# Altium PCB РАЗВОДКА.PcbDoc
Units mm, origin at the board's own origin, x right, y up, seen from the top; angles counter-clockwise.
Board outline 102.8 x 50.03 mm, 2 copper layers (Top Layer, Bottom Layer); 82 components, 57 nets, 350 pads, 71 vias.
Unrouted connection lines stored in the file: 1.
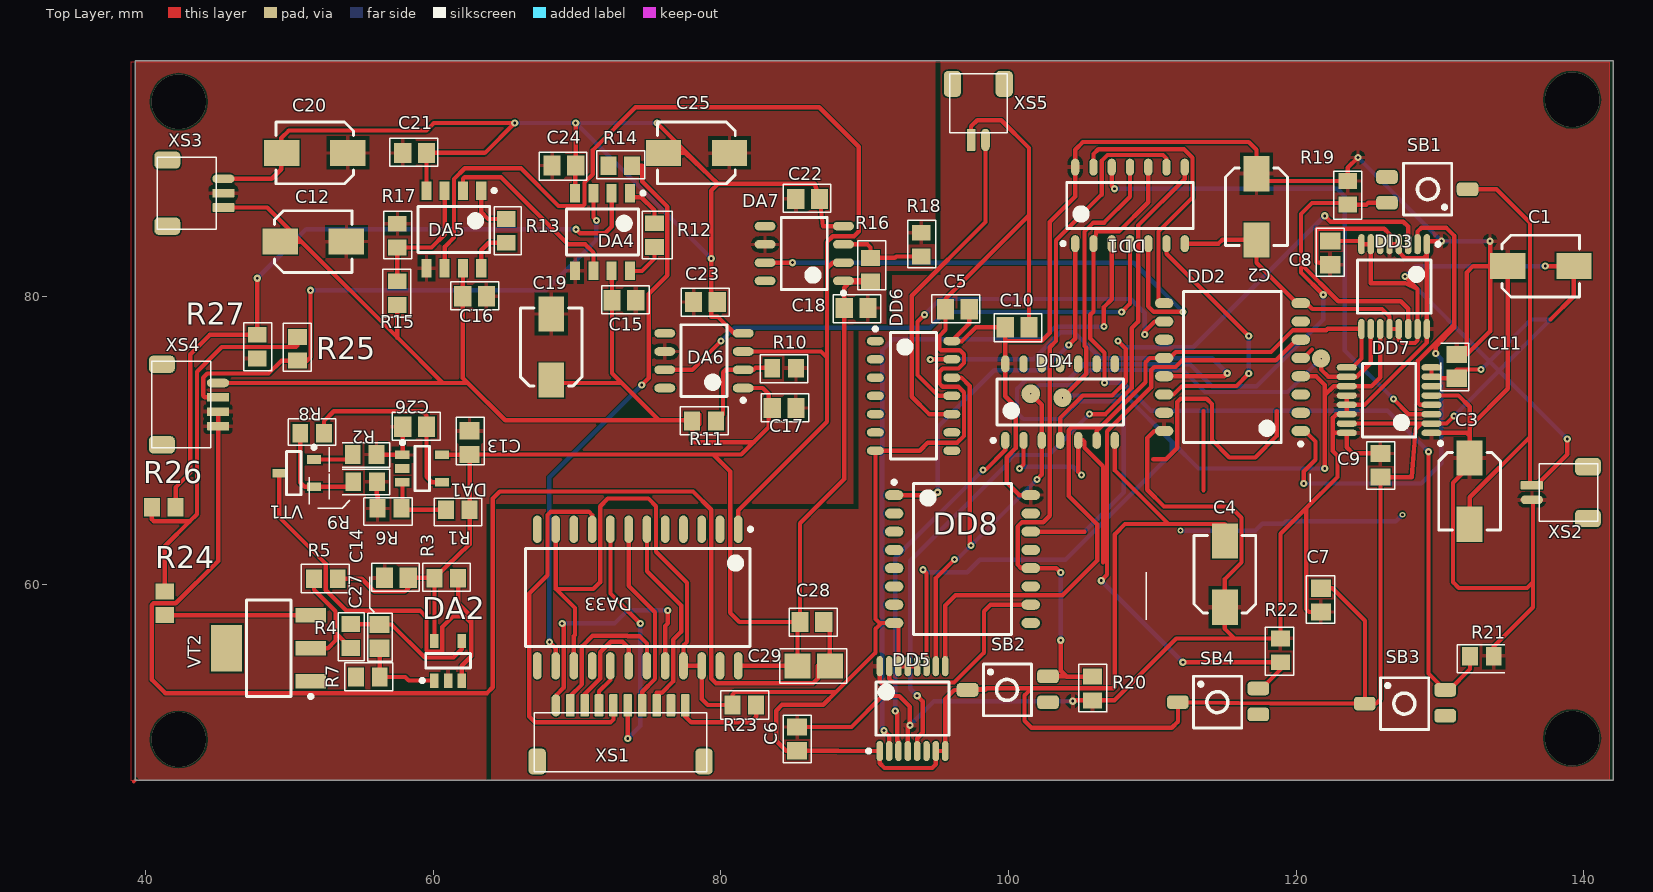
[diagram p0: Top Layer view]
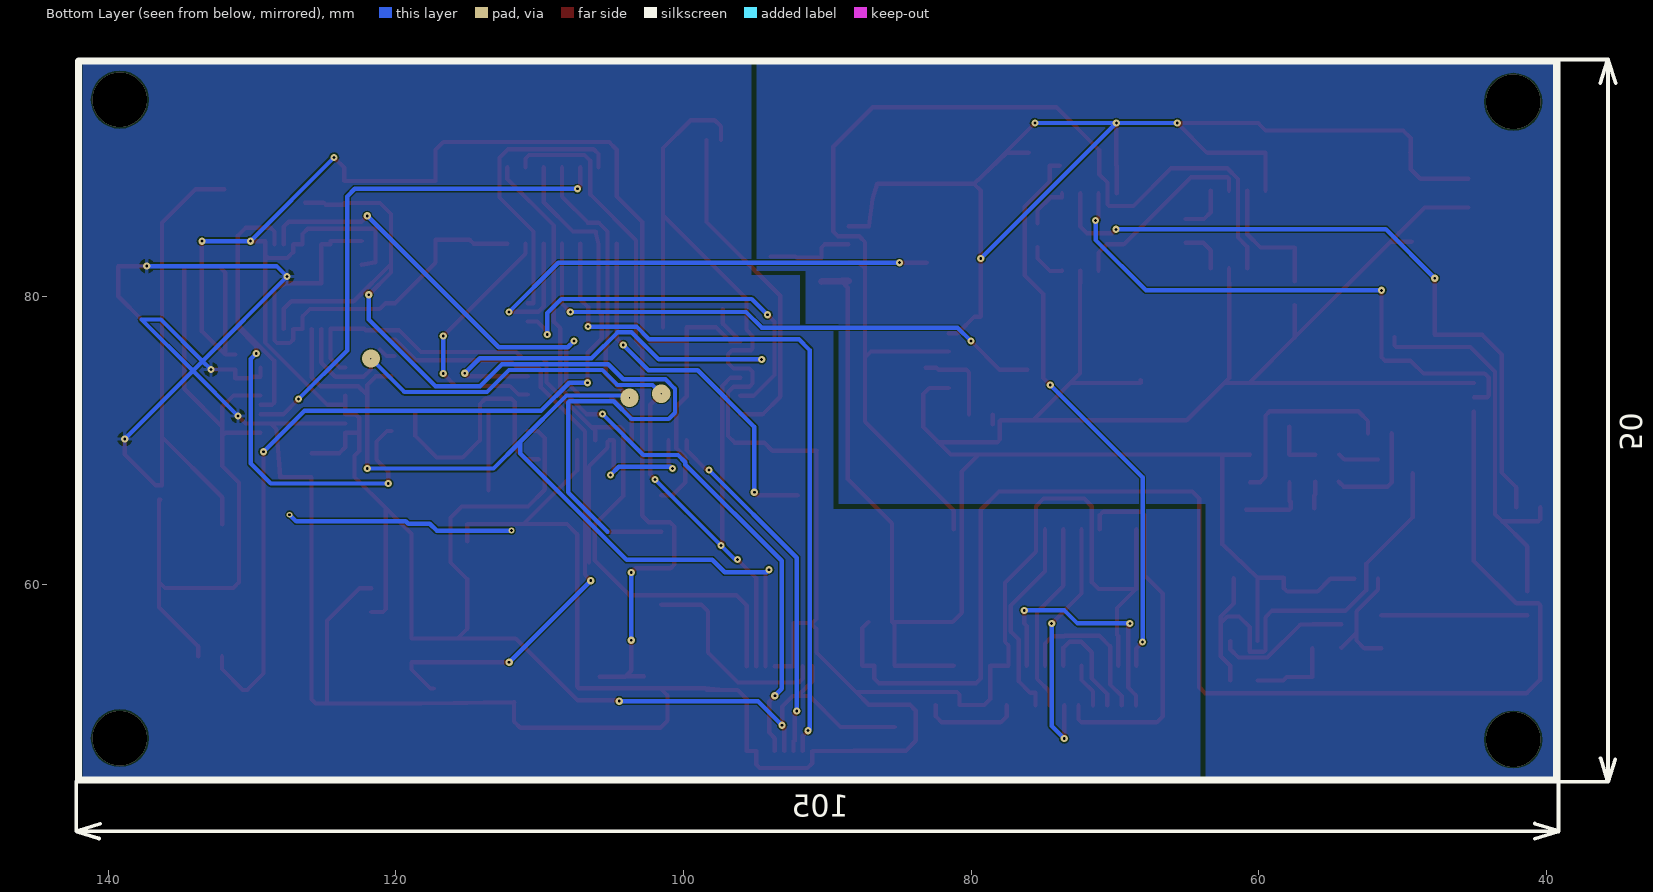
[diagram p1: Bottom Layer view, seen from below]
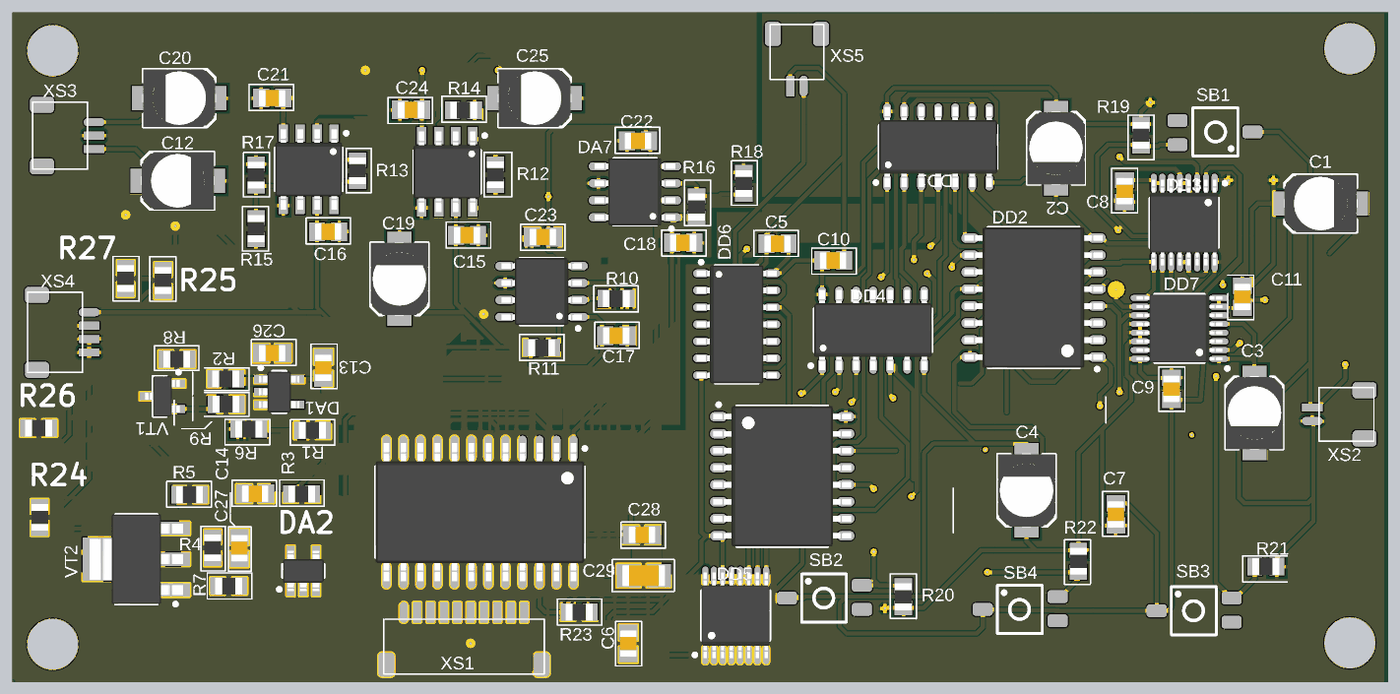
[diagram p2: 3D render of the assembled board from above, using the file's embedded part models]

## Layer stack, top to bottom
Top Solder: solder mask 0.0102, Solder Resist, Dk 3.5
Top Layer: signal copper 0.0356
Dielectric 1: dielectric 0.32, FR-4, Dk 4.8
Bottom Layer: signal copper 0.0356
Bottom Solder: solder mask 0.0102, Solder Resist, Dk 3.5

## Board outline
39.275,46.375 39.275,96.4 142.075,96.4 142.075,46.375

## Design rules (kind name [scope] priority, off if disabled: settings)
Clearance [All] p1: gap=0.1 ignorepadtopadclearanceinfootprint=FALSE except(0: Arc-Hole Track-Hole SMDPad-Hole THPad-Hole Via-Hole Fill-Hole Poly-Hole Region-Hole Text-Hole)
MinimumAnnularRing MinimumAnnularRing_1 [All] p1: minimumring=0.254
MinimumAnnularRing [All] p2: minimumring=0.254
PolygonConnect [All] p1: connectstyle=Relief reliefconductorwidth=0.254 reliefentries=4 polygonreliefangle="90 Angle" airgapwidth=0.254
RoutingVias [All] p1: holewidth=0.1 width=1.27 viastyle="Through Hole" minholewidth=0.2 minwidth=0.4 maxholewidth=0.2 maxwidth=0.4
SolderMaskExpansion [All] p1: expansion=0.102 istentingtop=FALSE
Width [All] p1: maxlimit=1 minlimit=0.1 preferedwidth=0.3
30 further rules are at their usual default settings.

## Components (designator, comment, footprint, x,y, rotation, side; value= is the part's Value field where it differs from the comment)
C5 "0.1uF" "Кер.ЧИП конд. 0.1 мкФ X7R 50В 10% 0805" 96.45,79.125 r0 top
C6 "0.1uF" "Кер.ЧИП конд. 0.1 мкФ X7R 50В 10% 0805" 85.3,49.25 r90 top
C7 "0.1uF" "Кер.ЧИП конд. 0.1 мкФ X7R 50В 10% 0805" 121.725,58.9 r270 top
C8 "0.1uF" "Кер.ЧИП конд. 0.1 мкФ X7R 50В 10% 0805" 122.375,83.05 r270 top
C9 "0.1uF" "Кер.ЧИП конд. 0.1 мкФ X7R 50В 10% 0805" 125.875,68.275 r90 top
C10 "0.1uF" "Кер.ЧИП конд. 0.1 мкФ X7R 50В 10% 0805" 100.6,77.875 r180 top
C11 "0.1uF" "Кер.ЧИП конд. 0.1 мкФ X7R 50В 10% 0805" 131.175,75.15 r90 top
C13 "0.1uF" "Кер.ЧИП конд. 0.1 мкФ X7R 50В 10% 0805" 62.525,69.85 r270 top
C14 "0.1uF" "Кер.ЧИП конд. 0.1 мкФ X7R 50В 10% 0805" 57.425,60.45 r0 top
C15 "0.1uF" "Кер.ЧИП конд. 0.1 мкФ X7R 50В 10% 0805" 73.25,79.75 r180 top
C16 "0.1uF" "Кер.ЧИП конд. 0.1 мкФ X7R 50В 10% 0805" 62.875,80.025 r180 top
C17 "0.1uF" "Кер.ЧИП конд. 0.1 мкФ X7R 50В 10% 0805" 84.4,72.25 r180 top
C18 "0.1uF" "Кер.ЧИП конд. 0.1 мкФ X7R 50В 10% 0805" 89.4,79.2 r180 top
C21 "0.1uF" "Кер.ЧИП конд. 0.1 мкФ X7R 50В 10% 0805" 58.7,90 r180 top
C22 "0.1uF" "Кер.ЧИП конд. 0.1 мкФ X7R 50В 10% 0805" 86.025,86.8 r180 top
C23 "0.1uF" "Кер.ЧИП конд. 0.1 мкФ X7R 50В 10% 0805" 78.925,79.625 r180 top
C24 "0.1uF" "Кер.ЧИП конд. 0.1 мкФ X7R 50В 10% 0805" 69.075,89.125 r180 top
C26 "1000pF" "Кер.ЧИП конд. 100пФ NPO 50В 5% 0805, GRM2165C1H101J" 58.7,70.95 r180 top
C27 "2200pF" "Кер.ЧИП конд. 100пФ NPO 50В 5% 0805, GRM2165C1H101J" 56.25,56.375 r270 top
C28 "0.1uF" "Кер.ЧИП конд. 0.1 мкФ X7R 50В 10% 0805" 86.325,57.375 r180 top
C29 "47uF" "Кер.ЧИП конд. 47 мкФ X5R 20% 10В 1206" 86.45,54.325 r180 top
DA1 "DA6" "ОУ для источника тока" 59.225,68.05 r0 top
DA2 "DA7" "ОУ для источника тока" 61.025,54.675 r90 top
DA4 "INA118E_BB" "AD620 Инструмент.усилитель" 71.77,84.5 r270 top
DA5 "INA118E_BB_1" "AD620 Инструмент.усилитель" 61.425,84.675 r270 top
DA6 "AD8561" AD8561 78.825,75.55 r180 top
DA7 "AD8561" AD8561 85.8,83 r180 top
DA33 "AD7824" AD7824 74.22,59.075 r270 top
DD1 "И №1 (4 компонента)" 4x2И 108.45,86.35 r90 top
DD2 "НЕ №3 (4 компонента)" CD4044B 115.575,75.1 r180 top
DD3 "Мультиплексор" Мультиплексор 126.825,80.7 r270 top
DD4 "И №2 (2 компонента)" 4x2И 103.59,72.665 r90 top
DD5 "Мультиплексор" Мультиплексор 93.325,51.35 r90 top
DD6 "3И №1" 4x2И 93.4,73.1 r0 top
DD7 "Мультиплексор" Мультиплексор 126.475,72.8 r180 top
DD8 "НЕ №4 (4 компонента)" CD4044B 96.8,61.75 r0 top
R1 "3k" "0.125Вт 0805 3 кОм, 5%, Чип резистор (SMD)" 61.7,65.175 r180 top
R2 "200" "0.125Вт 0805 3 кОм, 5%, Чип резистор (SMD)" 55.225,69.025 r180 top
R3 "470" "0.125Вт 0805 3 кОм, 5%, Чип резистор (SMD)" 60.9,60.425 r180 top
R4 "10k" "0.125Вт 0805 3 кОм, 5%, Чип резистор (SMD)" 54.25,56.4 r270 top
R5 "4.7" "0.125Вт 0805 3 кОм, 5%, Чип резистор (SMD)" 52.525,60.375 r0 top
R6 "2k" "0.125Вт 0805 3 кОм, 5%, Чип резистор (SMD)" 56.95,65.275 r180 top
R7 "330" "0.125Вт 0805 3 кОм, 5%, Чип резистор (SMD)" 55.45,53.55 r180 top
R8 "10k" "0.125Вт 0805 3 кОм, 5%, Чип резистор (SMD)" 51.575,70.5 r180 top
R9 "2k" "0.125Вт 0805 3 кОм, 5%, Чип резистор (SMD)" 55.25,67.125 r180 top
R10 "1.5k" "0.125Вт 0805 15Ом, 5%, Чип резистор (SMD)" 84.4,75.025 r180 top
R11 "8.2k" "0.125Вт 0805 82Ом, 5%, Чип резистор (SMD)" 78.825,71.35 r180 top
R12 "200k" "0.125Вт 0805 200 кОм, 5%, Чип резистор (SMD)" 75.375,84.275 r90 top
R13 "160k" "0.125Вт 0805 160 кОм, 5%, Чип резистор (SMD)" 65.075,84.575 r90 top
R14 "51k" "0.125Вт 0805 51 кОм, 5%, Чип резистор (SMD)" 73,89.1 r0 top
R15 "7.5k" "0.125Вт 0805 75Ом, 5%, Чип резистор (SMD)" 57.5,80.25 r90 top
R16 "1k" "0.125Вт 0805 91Ом, 5%, Чип резистор (SMD)" 90.4,81.875 r90 top
R17 "2.2k" "0.125Вт 0805 22Ом, 5%, Чип резистор (SMD)" 57.5,84.25 r270 top
R18 "56" "0.125Вт 0805 5.1Ом, 5%, Чип резистор (SMD)" 93.925,83.625 r270 top
R19 "10k" "0.125Вт 0805 3 кОм, 5%, Чип резистор (SMD)" 123.6,87.225 r90 top
R20 "10k" "0.125Вт 0805 3 кОм, 5%, Чип резистор (SMD)" 105.85,52.75 r270 top
R21 "10k" "0.125Вт 0805 3 кОм, 5%, Чип резистор (SMD)" 132.925,55 r0 top
R22 "10k" "0.125Вт 0805 3 кОм, 5%, Чип резистор (SMD)" 118.925,55.4 r90 top
R23 "0" "0.125Вт 0805 82Ом, 5%, Чип резистор (SMD)" 81.625,51.6 r0 top
R24 "0.125Вт 0805 15Ом, 5%, Чип резистор (SMD)_2_1" "0.125Вт 0805 15Ом, 5%, Чип резистор (SMD)" 41.325,58.675 r270 top
R25 "0.125Вт 0805 15Ом, 5%, Чип резистор (SMD)_2_1" "0.125Вт 0805 15Ом, 5%, Чип резистор (SMD)" 50.55,76.375 r90 top
R26 "0.125Вт 0805 15Ом, 5%, Чип резистор (SMD)_2_1" "0.125Вт 0805 15Ом, 5%, Чип резистор (SMD)" 41.25,65.35 r180 top
R27 "0.125Вт 0805 15Ом, 5%, Чип резистор (SMD)_2_1" "0.125Вт 0805 15Ом, 5%, Чип резистор (SMD)" 47.75,76.525 r90 top
SB1 "Выключатель кнопочный с замыкающим контактом" "Выключатель кнопочный ese21x" 129.175,87.475 r180 top
SB2 "Выключатель кнопочный с замыкающим контактом" "Выключатель кнопочный ese21x" 99.9,52.65 r0 top
SB3 "Выключатель кнопочный с замыкающим контактом" "Выключатель кнопочный ese21x" 127.525,51.7 r0 top
SB4 "Выключатель кнопочный с замыкающим контактом" "Выключатель кнопочный ese21x" 114.525,51.8 r0 top
VT1 "Транзистор N-канальный" "Транзистор N-канальный" 50.5,67.725 r180 top
VT2 "Транзистор р-канальный" "Транзистор р-канальный" 48.55,55.55 r180 top
XS1 "XS 10Pin" CI1108M1H 67.025,49.375 r0 top
XS2 "XS 2Pin (D)" "CI1102M1H  (F)" 138.6,64.375 r90 top
XS3 "XS 3Pin (A)" "CI1108M1H - duplicate" 43.2,89.7 r270 top
XS4 "XS Датчик" CI1102M1H 42.825,75.5 r270 top
XS5 "XS 2Pin_1" "CI1102M1H  (F)" 99.9,93.1 r180 top
С1 "1uF" "ECAP SMD, 1 мкФ, 50В, Конденсатор электролитический алюминиевый SMD" 137.025,82.125 r0 top
С2 "1uF" "ECAP SMD, 1 мкФ, 50В, Конденсатор электролитический алюминиевый SMD" 117.25,86.25 r270 top
С3 "1uF" "ECAP SMD, 1 мкФ, 50В, Конденсатор электролитический алюминиевый SMD" 132.075,66.475 r270 top
С4 "1uF" "ECAP SMD, 1 мкФ, 50В, Конденсатор электролитический алюминиевый SMD" 115.05,60.7 r90 top
С12 "1uF" "ECAP SMD, 1 мкФ, 50В, Конденсатор электролитический алюминиевый SMD" 51.65,83.825 r0 top
С19 "1uF" "ECAP SMD, 1 мкФ, 50В, Конденсатор электролитический алюминиевый SMD" 68.2,76.5 r90 top
С20 "1uF" "ECAP SMD, 1 мкФ, 50В, Конденсатор электролитический алюминиевый SMD" 51.75,90 r180 top
С25 "1uF" "ECAP SMD, 1 мкФ, 50В, Конденсатор электролитический алюминиевый SMD" 78.3,90 r180 top

## Footprints (in the part's own frame and the unit in brackets; to place one, negate y for a bottom-side part, rotate by r counter-clockwise, add the part's x,y. Pads: shape width x height; smd on the part's side, far side on the other; paste and mask are expansions set on the pad)
"0.125Вт 0805 3 кОм, 5%, Чип резистор (SMD)" [mm]
  rect 1.1x1.3 smd: 1(-0.825,0) 2(0.825,0)
  body extent -1,-0.63 1,0.63, height 0.5
"0.125Вт 0805 5.1Ом, 5%, Чип резистор (SMD)" [mm]
  rect 1.1x1.3 smd: 1(-0.825,0) 2(0.825,0)
  body extent -1,-0.63 1,0.63, height 0.5
"0.125Вт 0805 15Ом, 5%, Чип резистор (SMD)" [mm]
  rect 1.1x1.3 smd: 1(-0.825,0) 2(0.825,0)
  body extent -1,-0.63 1,0.63, height 0.5
"0.125Вт 0805 22Ом, 5%, Чип резистор (SMD)" [mm]
  rect 1.1x1.3 smd: 1(-0.825,0) 2(0.825,0)
  body extent -1,-0.63 1,0.63, height 0.5
"0.125Вт 0805 51 кОм, 5%, Чип резистор (SMD)" [mm]
  rect 1.1x1.3 smd: 1(-0.825,0) 2(0.825,0)
  body extent -1,-0.63 1,0.63, height 0.5
"0.125Вт 0805 75Ом, 5%, Чип резистор (SMD)" [mm]
  rect 1.1x1.3 smd: 1(-0.825,0) 2(0.825,0)
  body extent -1,-0.63 1,0.63, height 0.5
"0.125Вт 0805 82Ом, 5%, Чип резистор (SMD)" [mm]
  rect 1.1x1.3 smd: 1(-0.825,0) 2(0.825,0)
  body extent -1,-0.63 1,0.63, height 0.5
"0.125Вт 0805 91Ом, 5%, Чип резистор (SMD)" [mm]
  rect 1.1x1.3 smd: 1(-0.825,0) 2(0.825,0)
  body extent -1,-0.63 1,0.63, height 0.5
"0.125Вт 0805 160 кОм, 5%, Чип резистор (SMD)" [mm]
  rect 1.1x1.3 smd: 1(-0.825,0) 2(0.825,0)
  body extent -1,-0.63 1,0.63, height 0.5
"0.125Вт 0805 200 кОм, 5%, Чип резистор (SMD)" [mm]
  rect 1.1x1.3 smd: 1(-0.825,0) 2(0.825,0)
  body extent -1,-0.63 1,0.63, height 0.5
4x2И [mm] "MC74ACT08DG, Логический элемент И, 74ACT08, 2 входа, 24мА, 4.5В до 5.5В, SOIC-14"
  oval 1.18x0.58 smd: 1(-2.66,3.81) 2(-2.66,2.54) 3(-2.66,1.27) 4(-2.66,0) 5(-2.66,-1.27) 6(-2.66,-2.54) 7(-2.66,-3.81) 8(2.66,-3.81) 9(2.66,-2.54) 10(2.66,-1.27) 11(2.66,0) 12(2.66,1.27) 13(2.66,2.54) 14(2.66,3.81)
  silkscreen extent -2.78,-4.4 1.6,4.77, body extent -3,-4.4 3,4.4, height 1.75
"AD620 Инструмент.усилитель" [mm] "SOIC, 8-Leads, Body 4,90x3,90mm, Pitch 1,27mm, IPC Medium Density"
  rect 1.28x0.7 smd: 1(-2.7,1.905) 2(-2.7,0.635) 3(-2.7,-0.635) 4(-2.7,-1.905) 5(2.7,-1.905) 6(2.7,-0.635) 7(2.7,0.635) 8(2.7,1.905)
  silkscreen extent -2.82,-2.5 1.6,2.93, body extent -3,-2.5 3,2.5, height 1.75
AD7824 [mm] "SOIC, 24-Leads, Body 15,40x7,50mm, Pitch 1,27mm, IPC Medium Density"
  oval 1.9x0.6 smd: 1(-4.75,6.985) 2(-4.75,5.715) 3(-4.75,4.445) 4(-4.75,3.175) 5(-4.75,1.905) 6(-4.75,0.635) 7(-4.75,-0.635) 8(-4.75,-1.905) 9(-4.75,-3.175) 10(-4.75,-4.445) 11(-4.75,-5.715) 12(-4.75,-6.985) 13(4.75,-6.985) 14(4.75,-5.715) 15(4.75,-4.445) 16(4.75,-3.175) 17(4.75,-1.905) 18(4.75,-0.635) 19(4.75,0.635) 20(4.75,1.905) 21(4.75,3.175) 22(4.75,4.445) 23(4.75,5.715) 24(4.75,6.985)
  silkscreen extent -4.87,-7.8 3.4,7.96, body extent -5.16,-7.8 5.16,7.8, height 2.65
AD8561 [mm] "SOIC, 8-Leads, Body 4,90x3,90mm, Pitch 1,27mm, IPC Medium Density"
  oval 1.45x0.6 smd: 1(-2.725,1.905) 2(-2.725,0.635) 3(-2.725,-0.635) 4(-2.725,-1.905) 5(2.725,-1.905) 6(2.725,-0.635) 7(2.725,0.635) 8(2.725,1.905)
  silkscreen extent -2.85,-2.5 1.6,2.88, body extent -3,-2.5 3,2.5, height 1.75
CD4044B [mm] "SOIC, 16-Leads, Body 10,30x7,50mm, Pitch 1,27mm, IPC Medium Density"
  oval 1.28x0.7 smd: 1(-4.75,4.445) 2(-4.75,3.175) 3(-4.75,1.905) 4(-4.75,0.635) 5(-4.75,-0.635) 6(-4.75,-1.905) 7(-4.75,-3.175) 8(-4.75,-4.445) 9(4.75,-4.445) 10(4.75,-3.175) 11(4.75,-1.905) 12(4.75,-0.635) 13(4.75,0.635) 14(4.75,1.905) 15(4.75,3.175) 16(4.75,4.445)
  silkscreen extent -4.88,-5.25 3.4,5.47, body extent -5.16,-5.25 5.16,5.25, height 2.65
CI1102M1H [mm]
  oval 0.6x1.55 smd: 1(1.5,2.2)
  rrect20% 0.6x1.55 smd: 2(2.5,2.2) 3(3.5,2.2) 4(4.5,2.2)
  rrect50% 1.2x1.8 smd: 5(0.2,-1.7) 6(5.8,-1.7)
  silkscreen extent 0,-2.4 6,1.7
"CI1102M1H  (F)" [mm]
  oval 0.6x1.55 smd: 1(1.5,2.2)
  rrect20% 0.6x1.55 smd: 2(2.5,2.2)
  rrect50% 1.2x1.8 smd: 3(0.2,-1.7) 4(3.8,-1.7)
  silkscreen extent 0,-2.4 4,1.7
CI1108M1H [mm]
  oval 0.6x1.55 smd: 1(1.5,2.2)
  rrect20% 0.6x1.55 smd: 2(2.5,2.2) 3(3.5,2.2) 4(4.5,2.2) 5(5.5,2.2) 6(6.5,2.2) 7(7.5,2.2) 8(8.5,2.2) 9(9.5,2.2) 10(10.5,2.2)
  rrect50% 1.2x1.8 smd: 11(0.2,-1.7) 12(11.8,-1.7)
  silkscreen extent 0,-2.4 12,1.7
"CI1108M1H - duplicate" [mm]
  rrect20% 0.6x1.55 smd: 1(3.5,2.2) 2(2.5,2.2)
  oval 0.6x1.55 smd: 3(1.5,2.2)
  rrect50% 1.2x1.8 smd: 4(0.2,-1.7) 5(4.8,-1.7)
  silkscreen extent 0,-2.4 5,1.7
"ECAP SMD, 1 мкФ, 50В, Конденсатор электролитический алюминиевый SMD" [mm] "ECAP SMD, 1 мкФ, 50В, Конденсатор электролитический алюминиевый SMD"
  rect 2.45x1.8 smd: 1(-2.3,0) 2(2.3,0)
  silkscreen extent -2.7,-2.15 2.7,2.15, body extent -2.75,-2.15 2.75,2.15, height 5.4
"Выключатель кнопочный ese21x" [mm] "SOTFL, 3-Leads, Body 3,62x1,60mm, Pitch 1,50mm, IPC Medium Density"
  rrect50% 1.5x0.95 smd: 1(-2.75,0) 2(2.85,0.95) 3(2.85,-0.85)
  silkscreen extent -1.65,-1.8 1.7,1.8
"Кер.ЧИП конд. 0.1 мкФ X7R 50В 10% 0805" [mm]
  rect 1.2x1.4 smd: 1(-0.825,0) 2(0.825,0)
  body extent -1,-0.63 1,0.63, height 1.3
"Кер.ЧИП конд. 47 мкФ X5R 20% 10В 1206" [mm] "Кер.ЧИП конд. 47 мкФ X5R 20% 10В 1206"
  rect 1.8x1.75 smd: 1(-1.125,0) 2(1.125,0)
  body extent -1.6,-0.8 1.6,0.8, height 1.5
"Кер.ЧИП конд. 100пФ NPO 50В 5% 0805, GRM2165C1H101J" [mm]
  rect 1.2x1.4 smd: 1(-0.825,0) 2(0.825,0)
  body extent -1,-0.63 1,0.63, height 1.3
Мультиплексор [mm] "TSOP, 16-Leads, Body 5,00x4,40mm, Pitch 0,65mm, IPC Medium Density"
  oval 1.4x0.45 smd: 1(-2.95,2.275) 2(-2.95,1.625) 3(-2.95,0.975) 4(-2.95,0.325) 5(-2.95,-0.325) 6(-2.95,-0.975) 7(-2.95,-1.625) 8(-2.95,-2.275) 9(2.95,-2.275) 10(2.95,-1.625) 11(2.95,-0.975) 12(2.95,-0.325) 13(2.95,0.325) 14(2.95,0.975) 15(2.95,1.625) 16(2.95,2.275)
  silkscreen extent -3.07,-2.55 1.85,3.17, body extent -3.2,-2.55 3.2,2.55, height 0.95
"ОУ для источника тока" [mm] "SOT23, 5-Leads, Body 2,90x2,80mm, Pitch 0,95mm, IPC Medium Density"
  rect 1x0.6 smd: 1(-1.375,0.95) 2(-1.375,0) 3(-1.375,-0.95) 4(1.375,-0.95) 5(1.375,0.95)
  silkscreen extent -1.5,-1.55 0.5,1.92, body extent -1.5,-1.53 1.5,1.53, height 1.45
"Транзистор N-канальный" [mm] "SOT23, 3-Leads, Body 2,92x2,45mm, Pitch 0,95mm, IPC Medium Density"
  rect 1x0.6 smd: 1(-1.2,-0.95) 2(-1.2,0.95) 3(1.2,0)
  silkscreen extent -1.33,-1.92 0.7,1.5, body extent -1.3,-1.52 1.3,1.52, height 1.12
"Транзистор р-канальный" [mm] "SOT223, 4-Leads, Body 6,50x7,00mm (avg), Pitch 2,30mm, IPC Medium Density"
  rect 2.15x1 smd: 1(-2.925,2.3) 2(-2.925,0) 3(-2.925,-2.3)
  rect 2.15x3.25 smd: 4(2.925,0)
  silkscreen extent -3.05,-3.35 1.55,3.47, body extent -3.5,-3.35 3.5,3.35, height 1.75

## Part data
C5 C6 C7 C8 C9 C10 C11 C13 C14 C15 C16 C17 C18 C21 C22 C23 C24 C28: library part "Кер.ЧИП конд. 0.1 мкФ X7R 50В 10% 0805", "Кер.ЧИП конд. 0.1 мкФ X7R 50В 10% 0805"
C26 C27: library part "Кер.ЧИП конд. 100пФ NPO 50В 5% 0805, GRM2165C1H101J", "Кер.ЧИП конд. 100пФ NPO 50В 5% 0805, GRM2165C1H101J"
C29: library part "Кер.ЧИП конд. 47 мкФ X5R 20% 10В 1206", "Кер.ЧИП конд. 47 мкФ X5R 20% 10В 1206"
DA1 DA2: library part "OPAx333 1.8-V, microPower, CMOS Operational Amplifiers, Zero-Drift Series", "ОУ"
DD3 DD5 DD7: "74HC40510"
R1 R2 R3 R4 R5 R6 R7 R8 R9 R19 R20 R21 R22: library part "0.125Вт 0805 5кОм, 5%, Чип резистор (SMD)", "0.125Вт 0805 5кОм, 5%, Чип резистор (SMD)"
R10: library part "0.125Вт 0805 15Ом, 5%, Чип резистор (SMD)_2_1", "0.125Вт 0805 15Ом, 5%, Чип резистор (SMD)"
R11 R23: library part "0.125Вт 0805 82Ом, 5%, Чип резистор (SMD)_2_2", "0.125Вт 0805 82Ом, 5%, Чип резистор (SMD)"
R12: library part "0.125Вт 0805 200 кОм, 5%, Чип резистор (SMD)", "0.125Вт 0805 200 кОм, 5%, Чип резистор (SMD)"
R13: library part "0.125Вт 0805 160 кОм, 5%, Чип резистор (SMD)", "0.125Вт 0805 160 кОм, 5%, Чип резистор (SMD)"
R14: library part "0.125Вт 0805 51 кОм, 5%, Чип резистор (SMD)", "0.125Вт 0805 51 кОм, 5%, Чип резистор (SMD)"
R15: library part "0.125Вт 0805 75Ом, 5%, Чип резистор (SMD)", "0.125Вт 0805 75Ом, 5%, Чип резистор (SMD)"
R16: library part "0.125Вт 0805 91кОм, 5%, Чип резистор (SMD)_1", "0.125Вт 0805 91Ом, 5%, Чип резистор (SMD)"
R17: library part "0.125Вт 0805 22Ом, 5%, Чип резистор (SMD)", "0.125Вт 0805 22Ом, 5%, Чип резистор (SMD)"
R18: library part "0.125Вт 0805 5.1Ом, 5%, Чип резистор (SMD)_2", "0.125Вт 0805 5.1Ом, 5%, Чип резистор (SMD)"
R24 R25 R26 R27: "0.125Вт 0805 15Ом, 5%, Чип резистор (SMD)"
VT1: "SI2304DDS-T1-GE3"
VT2: "NTF2955T1G, МОП-транзистор, P Канал, 2.6 А, -60 В, 0.17 Ом, 20 В, -4 В"
С1 С2 С3 С4 С12 С19 С20 С25: library part "ECAP SMD, 1 мкФ, 50В, Конденсатор электролитический алюминиевый SMD", "ECAP SMD, 1 мкФ, 50В, Конденсатор электролитический алюминиевый SMD"

## Via types
v1: diameter 0.5, hole 0.2, Top Layer to Bottom Layer, 62 vias
v2: diameter 3.8, hole 3.8, Top Layer to Bottom Layer, 4 vias
v3: diameter 1.27, hole 0.1, Top Layer to Bottom Layer, 3 vias
v4: diameter 0.4, hole 0.2, Top Layer to Bottom Layer, 2 vias

## Nets (pads, with @x,y where several pads share a name; then routed paths per layer and width w, separated by ;. In a path a pad name is that pad's centre, name@x,y a point inside that pad or via, vN(x,y) a via of type N, cw(c..) or ccw(c..) an arc to the next point about the centre after c; other vN are vias at no path point)
"+5V A": C13.2 C14.2 C15.2 C16.2 C17.2 C18.2 C28.2 C29.2 DA1.5 DA2.5 DA4.7 DA5.7 DA6.1 DA7.1 DA33.24 R1.1 R3.2 R5.2 R11.2 R15.1 R16.1 XS3.1 XS4.1 С12.1 С19.1 | length 190
  Top Layer w0.3: XS4.1 60.653,74 ; XS3.1 48.453,86.2 50.251,84.401 50.828,83.825 ; С12.1 50.828,83.825 ; R5.2 55.021,60.375 55.896,59.5 58.02,59.5 58.25,59.73 C14.2 R3.2@60.075,60.45 ; R15.1 57.5,77.153 ; DA2.5 R3.2 R3.2@60.075,60.45 ; DA1.5 C13.2@62.5,69 ; DA5.7 62.06,80.985 62.05,80.975 C16.2 62.05,74.346 62.396,74 ; С19.1 68.2,74 73.1,74 ; DA4.7 72.405,80.924 72.425,80.904 C15.2 72.425,74.675 73.1,74 ; R11.2@78.5,71.12 R11.2@78.5,71.8 ; DA33.24 C29.2 85.325,57.2 C28.2 ; DA6.1 82.906,73.645 83.325,73.226 83.325,72.25 83.325,70.93 82.276,69.88 ; DA7.1@89.002,81.05 88.575,80.623 C18.2 88.575,67.315 85.5,64.24 C28.2 ; 50.828,83.825 57.5,77.153 ; 57.5,77.153 60.653,74 ; R3.2@60.075,60.45 62.525,62.787 R1.1 C13.2 79.463,69.025 ; 60.653,74 62.396,74 ; 62.396,74 64.996,71.4 75.7,71.4 ; 73.1,74 75.7,71.4 ; 75.7,71.4 77.95,71.4 R11.2 78,70.056 78.176,69.88 82.276,69.88 ; 79.463,69.025 81.42,69.025 82.276,69.88 ; 79.463,69.025 80.645,67.843 80.645,58.01 81.28,57.375 C28.2
  Top Layer w0.5: DA7.1 88.575,81.095 89.002,81.084 R16.1
"+5V D": C5.2 C6.2 C7.2 C8.2 C9.2 C10.2 C11.2 DD1.14 DD2.16 DD3.1 DD3.4 DD3.5 DD3.16 DD4.14 DD5.4 DD5.16 DD6.14 DD7.1 DD7.5 DD7.12 DD7.13 DD7.14 DD7.16 DD8.16 R19.2 R20.2 R21.2 R22.2 XS2.1 С1.1 С2.1 С3.1 С4.1 | length 264.2
  Top Layer w0.3: C6.2 89.078,50.075 91.228,52.225 92.058,52.225 ; DD5.16 91.05,53.233 92.058,52.225 ; DD5.4 93,50.049 v1(93.142,50.19) 93.142,51.482 92.399,52.225 92.058,52.225 ; C5.2 97.275,78.125 DD6.14 96.774,76.91 97.739,77.875 C10.2 99.775,77.013 99.78,77.008 ; DD8.16 100.759,66.195 99.877,67.077 99.877,68.834 100.508,69.465 100.508,72.348 99.78,73.076 DD4.14 99.78,77.008 ; v1(104.47,51.867) 104.528,51.925 R20.2 107.373,51.925 111.673,56.225 115.721,56.225 ; DD2.16 110.134,70.655 109.652,70.172 109.652,66.573 110.82,65.405 115.418,65.405 116.205,64.618 116.205,61.519 115.05,60.364 С4.1 115.05,56.896 115.721,56.225 ; C7.2 120.904,58.075 120.701,58.278 120.701,65.282 ; C8.2 121.425,82.385 121.425,84.725 126.134,84.725 126.5,84.359 DD3.5 DD3.4 127.15,83.096 127.554,82.692 128.871,82.692 129.1,82.921 ; DD7.12 DD7.13 ; v1(124.303,89.677) 123.6,88.974 R19.2 117.25,88.05 С2.1 117.25,90.221 116.717,90.754 105.173,90.754 104.64,90.221 DD1.14 104.64,86.97 102.87,85.2 102.87,77.47 102.311,76.911 99.877,76.911 99.78,77.008 ; C9.2 123.952,69.1 123.525,69.527 DD7.16 122.551,70.525 ; DD7.1 131.857,70.525 132.075,70.307 ; DD7.5 131.289,73.125 132.075,72.339 132.075,70.942 ; v1(130.12,83.86) 129.1,83.86 DD3.1 129.1,82.921 ; C11.2 131.877,75.975 ; v1(133.498,83.86) 133.498,82.125 ; XS2.1 136.474,65.875 136.474,60.147 ; 115.721,56.225 R22.2 118.925,63.506 120.701,65.282 ; 120.701,65.282 122.881,67.462 122.881,68.932 122.551,69.262 122.551,70.525 ; 122.551,70.525 122.551,71.571 122.805,71.825 DD7.14 DD7.13 ; DD7.13 124.765,72.475 129.1,76.81 DD3.16 129.1,82.921 ; 131.877,75.975 131.877,81.686 132.315,82.125 133.498,82.125 ; 131.877,75.975 133.498,77.596 133.498,82.125 ; 132.075,70.307 132.075,70.942 ; 132.075,70.307 С3.1 132.075,68.219 130.912,67.056 130.912,60.147 131.318,59.741 136.068,59.741 136.474,60.147 ; 132.075,70.942 134.725,73.592 С1.1 133.498,82.125 ; 133.753,55.68 133.75,55.677 R21.2 133.753,55.68 ; 133.753,55.68 136.474,58.401 136.474,60.147
  Bottom Layer w0.3: v1(93.142,50.19) 94.818,51.867 v1(104.47,51.867) ; v1(124.303,89.677) v1(130.12,83.86) v1(133.498,83.86)
"-5V A": C21.1 C22.1 C23.1 C24.1 DA4.4 DA5.4 DA6.4 DA7.4 XS3.3 С20.2 С25.2 | length 96.2
  Top Layer w0.3: XS3.3 48.768,88.2 49.428,88.86 С20.2@49.428,90 ; С20.2 С20.2@49.428,90 ; DA4.4 69.865,89.125 C24.1 v1(69.9,92.075) ; v1(75.565,92.075) 79.795,87.846 ; С25.2 77.5,90 79.795,87.846 ; DA6.4 80.924,77.455 79.766,78.613 79.325,78.613 79.325,79.4 v1(79.325,82.65) 79.325,87.376 79.795,87.846 ; DA7.4 87.097,84.905 C22.1 86.527,87.846 79.795,87.846 ; С20.2@49.428,90 49.428,91.034 49.954,91.559 59.52,91.559 60.036,92.075 v1(65.659,92.075) 63.584,90 C21.1 59.525,88.676 ; 59.525,88.676 59.52,88.671 DA5.4 59.525,88.676
  Bottom Layer w0.3: v1(65.659,92.075) v1(69.9,92.075) ; v1(75.565,92.075) v1(69.9,92.075) ; v1(79.325,82.65) v1(69.9,92.075)
A: C13.1 C14.1 C15.1 C16.1 C17.1 C18.1 C21.2 C22.2 C23.2 C24.2 C26.2 C28.1 C29.1 DA1.1 DA2.2 DA4.5 DA5.5 DA6.6 DA7.6 DA33.10 DA33.12 DA33.13 DA33.16 R2.1 R6.2 R9.1 R10.1 R17.1 R18.1 R23.2 R27.1 XS1.9 XS1.10 XS3.2 XS4.3 XS4.4 С12.2 С19.2 С20.1 С25.1 | length 111.7
  Top Layer w0.3: XS4.4 XS4.4@45.034,71 ; XS4.3 45.034,72 XS4.4@45.034,71 ; R2.1 56.075,69 DA1.1 57.875,69.025 C26.2 ; R9.1 56.075,66.217 56.125,66.167 R6.2 ; XS1.10 77.525,50.8 77.931,50.394 82.044,50.394 82.45,50.8 R23.2 ; C28.1 87.575,56.95 C29.1 86.741,54.325 86.741,53.442 86.411,53.111 79.654,53.111 79.324,53.442 79.324,65.176 78.054,66.446 64.618,66.446 64.135,65.964 64.135,52.832 63.729,52.426 41.351,52.426 40.411,53.365 40.411,58.547 40.538,58.674 42.088,58.674 45.034,61.62 XS4.4@45.034,71
D: C5.1 C6.1 C7.1 C8.1 C9.1 C10.1 C11.1 DA33.11 DA33.15 DA33.21 DA33.22 DD1.7 DD2.8 DD3.7 DD3.8 DD3.12 DD3.13 DD3.15 DD4.7 DD5.1 DD5.7 DD5.8 DD5.12 DD5.13 DD5.14 DD6.7 DD7.2 DD7.7 DD7.8 DD7.15 DD8.8 R23.1 SB1.1 SB2.1 SB3.1 SB4.1 XS2.2 XS5.2 С1.2 С2.2 С3.2 С4.2 | length 383.5
  Top Layer w0.3: DA33.11 68.505,59.69 68.522,59.673 ; DA33.15 69.775,56.397 69.846,56.468 69.846,58.349 68.522,59.673 ; DD6.7 DD6.7@90.754,69.29 ; DD5.12 DD5.13 DD5.14 92.35,55.266 92.354,55.27 92.354,57.305 DD8.8 91.163,57.305 ; XS5.2 97.4,91.846 97.823,92.269 99.501,92.269 101.425,90.345 101.425,85.658 ; C10.1 101.425,85.658 ; DD4.7 107.4,67.911 111.125,64.186 ; DD1.7 114.605,83.69 114.865,83.95 С2.2 117.25,82.361 120.066,79.545 DD2.8 120.726,79.545 121.125,79.146 125.984,79.146 126.5,78.63 DD3.12 DD3.13 127.15,77.013 127.379,76.784 128.275,76.784 128.45,76.959 DD3.15 128.45,80.516 ; С4.2 115.05,64.186 111.125,64.186 ; C7.1 122.53,59.725 124.79,57.464 SB3.1@124.79,51.7 ; C8.1 124.55,83.875 DD3.8 DD3.7 125.2,80.939 127.571,80.939 128.45,80.516 ; DD7.15 128.702,71.175 ; v1(127.571,81.395) 128.45,80.516 ; DD7.8 DD7.7 129.941,74.425 130.041,74.325 C11.1 131.175,74.93 v1(132.867,74.93) ; v1(130.988,71.704) 130.459,71.175 DD7.2 128.702,71.175 ; SB1.1 133.937,87.475 136.271,85.141 136.271,70.248 ; С3.2 132.075,66.052 136.271,70.248 ; v1(137.33,82.125) С1.2@139.319,82.125 ; 137.693,78.41 139.319,80.035 С1.2@139.319,82.125 ; v1(138.862,70.104) 138.862,69.031 136.706,66.875 XS2.2 136.271,66.875 136.271,70.248 ; С1.2 С1.2@139.319,82.125 ; 68.522,59.673 71.128,59.673 71.603,60.147 71.603,65.43 72.136,65.964 74.955,65.964 75.489,65.43 75.489,62.257 77.639,60.107 77.639,55.992 77.395,55.748 DA33.21 DA33.22 78.665,52.019 79.084,51.6 R23.1 80.8,52.327 80.975,52.502 88.011,52.502 ; 88.011,52.502 90.754,55.245 90.754,56.896 91.163,57.305 ; 88.011,52.502 87.122,51.613 84.252,51.613 83.845,51.206 83.845,49.111 84.531,48.425 C6.1 88.138,48.425 88.163,48.4 DD5.1 91.05,47.549 91.38,47.219 94.691,47.219 94.95,47.477 DD5.7 DD5.8 95.6,52.019 96.231,52.65 SB2.1 ; DD6.7@90.754,69.29 90.754,57.584 91.034,57.305 91.163,57.305 ; DD6.7@90.754,69.29 93.826,69.29 94.386,69.85 96.444,69.85 96.901,70.307 96.901,73.355 96.52,73.736 95.428,73.736 95.199,73.965 95.199,74.778 95.428,75.006 96.52,75.006 96.901,75.387 96.901,75.997 96.622,76.276 95.301,76.276 95.199,76.378 95.199,77.267 95.625,77.693 C5.1 95.625,79.858 101.425,85.658 ; SB2.1 98.48,52.756 ; SB2.1 98.374,52.65 98.48,52.756 ; 98.48,52.756 101.6,52.756 ; 101.6,52.756 107.29,52.756 107.4,52.866 107.4,63.483 108.102,64.186 111.125,64.186 ; 101.6,52.756 101.113,52.269 101.113,50.499 101.6,50.013 111.354,50.013 111.785,50.444 SB4.1@111.785,51.8 ; SB4.1@111.785,51.8 SB4.1 SB4.1@111.785,51.8 ; SB4.1@111.785,51.8 118.212,51.7 ; SB4.1@111.785,51.8 118.212,51.7 ; 118.212,51.7 SB3.1 SB3.1@124.79,51.7 ; SB3.1@124.79,51.7 125.578,51.7 125.875,51.997 C9.1 128.054,67.45 128.307,70.714 128.313,70.714 128.313,70.786 128.702,71.175
  Bottom Layer w0.3: v1(130.988,71.704) 134.125,74.841 ; v1(132.867,74.93) 133.452,75.514 ; v1(137.33,82.125) 128.302,82.125 v1(127.571,81.395) 133.452,75.514 ; v1(138.862,70.104) 134.125,74.841 ; 133.452,75.514 136.347,78.41 137.693,78.41 134.125,74.841 ; 133.452,75.514 134.125,74.841
NetC26_1: C26.1 DA1.4 R8.1 | length 13.9
  Top Layer w0.3: R8.1 52.4,71.346 53.079,72.025 59.23,72.025 59.525,71.73 C26.1 59.525,67.475 59.9,67.1 DA1.4
NetC27_1: C27.1 DA2.4 R4.1 | length 9.5
  Top Layer w0.3: R4.1 56.225,57.225 C27.1 57.1,57.2 59.4,54.9 61.401,54.9 61.975,55.474 DA2.4
NetC27_2: C27.2 DA2.1 R7.1 | length 5.9
  Top Layer w0.3: C27.2 56.275,55.525 R7.1 58.039,53.55 58.289,53.3 DA2.1
NetDA1_3: DA1.3 R1.2 R6.1 | length 5
  Top Layer w0.3: DA1.3 57.85,65.775 57.775,65.775 R6.1 57.875,65.175 R1.2
NetDA2_3: DA2.3 R3.1 VT1.3 | length 32.7
  Top Layer w0.3: VT1.3 49.276,67.725 49.276,64.668 52.527,61.417 52.527,59.577 53.938,58.166 59.068,58.166 59.525,57.709 59.525,55.414 59.639,55.3 60.625,55.3 60.625,57.023 61.362,57.76 62.179,57.76 62.636,57.302 ; R3.1 61.725,58.671 62.636,57.76 62.636,57.302 ; DA2.3 61.975,54.331 62.636,54.992 62.636,57.302
NetDA4_1: DA4.1 R12.2 | length 3.3
  Top Layer w0.3: DA4.1 73.675,86.919 74.461,86.919 75.375,86.004 R12.2
NetDA4_2: DA4.2 R26.1 R27.2 | length 48.9
  Top Layer w0.3: R26.1 42.075,66.738 43.104,67.767 43.104,75.997 44.457,77.35 R27.2 v1(47.75,81.28) ; v1(69.926,84.684) 70.206,84.404 71.933,84.404 72.405,84.876 DA4.2
  Bottom Layer w0.3: v1(47.75,81.28) 51.154,84.684 v1(69.926,84.684)
NetDA4_3: DA4.3 R25.1 XS4.2 | length 39.7
  Top Layer w0.3: XS4.2 44.094,73 43.993,73.102 43.993,74.371 44.272,74.651 48.539,74.651 49.439,75.55 R25.1 51.217,75.55 51.46,75.794 v1(51.46,80.442) ; DA4.3 71.135,85.511 v1(71.338,85.308)
  Bottom Layer w0.3: v1(51.46,80.442) 67.841,80.442 71.338,83.939 v1(71.338,85.308)
NetDA4_6: DA4.6 DA5.2 | length 13.4
  Top Layer w0.3: DA5.2 62.06,88.191 62.179,88.31 64.703,88.31 69.376,83.637 70.563,83.637 71.135,83.065 DA4.6
NetDA4_8: DA4.8 R12.1 | length 2.9
  Top Layer w0.3: DA4.8 73.675,81.788 74.511,81.788 75.375,82.652 R12.1
NetDA5_1: DA5.1 R13.2 | length 3.4
  Top Layer w0.3: DA5.1 63.33,85.87 63.8,85.4 R13.2
NetDA5_3: DA5.3 R15.2 R17.2 | length 9.1
  Top Layer w0.3: R15.2 R17.2 59.875,83.425 60.79,84.34 DA5.3
NetDA5_6: DA5.6 DA6.3 DA7.2 DA33.1 | length 80.1
  Top Layer w0.3: DA5.6 60.79,83.464 61.443,84.117 61.443,88.189 62.179,88.925 66.091,88.925 68.707,86.309 70.409,86.309 70.51,86.411 70.51,87.935 71.095,88.519 71.095,90.195 74.066,93.167 86.843,93.167 89.586,90.424 89.586,84.531 89.256,84.201 87.782,84.201 87.376,83.795 87.376,81.959 ; DA33.1 81.205,65.126 87.375,71.296 87.375,75.775 86.965,76.185 DA6.3 ; 87.376,75.775 87.376,81.959 ; DA7.2 87.782,82.365 87.376,81.959
NetDA5_8: DA5.8 R13.1 | length 3.2
  Top Layer w0.3: DA5.8 63.33,83.23 63.85,83.75 R13.1
NetDA6_2: DA6.2 R10.2 R11.1 | length 6.1
  Top Layer w0.3: R11.1@80.15,71.8 80.15,74.75 80.315,74.915 DA6.2 82.271,74.915 82.406,75.05 R10.2@83.175,75.05
NetDA6_7: DA6.7 DD1.4 | length 38.4
  Top Layer w0.3: DA6.7 78.014,74.915 v1(80.01,76.911) ; v1(107.873,78.939) 108.45,79.516 DD1.4
  Bottom Layer w0.3: v1(80.01,76.911) 80.941,77.842 94.552,77.842 95.648,78.939 v1(107.873,78.939)
NetDA7_3: DA7.3 R16.2 R18.2 | length 6.3
  Top Layer w0.3: DA7.3 90.19,83.635 90.4,83.425 R16.2 92.1,82.7 92.2,82.8 R18.2
NetDA7_7: DA7.7 DD1.5 | length 37.4
  Top Layer w0.3: DA7.7 v1(84.981,82.365) ; DD1.5 109.72,79.324 110.101,78.943 v1(112.141,78.943)
  Bottom Layer w0.3: v1(84.981,82.365) 108.719,82.365 v1(112.141,78.943)
NetDA33_6: DA33.6 XS1.8 | length 14.2
  Top Layer w0.3: DA33.6 74.855,60.9 77.239,58.517 77.239,56.705 76.675,56.141 76.675,53.238 75.893,52.456 75.525,52.456 XS1.8
NetDA33_7: DA33.7 XS1.7 | length 13.4
  Top Layer w0.3: DA33.7 73.585,59.884 75.413,58.056 75.413,53.416 74.525,52.529 XS1.7
NetDA33_8: DA33.8 XS1.6 | length 18.1
  Top Layer w0.3: DA33.8 72.315,59.359 v1(74.397,57.277) ; v1(73.525,49.268) XS1.6
  Bottom Layer w0.3: v1(73.525,49.268) 74.397,50.14 v1(74.397,57.277)
NetDA33_9: DA33.9 XS1.5 | length 25.9
  Top Layer w0.3: DA33.9 71.045,64.821 70.816,65.049 68.174,65.049 67.945,64.821 67.945,60.63 66.675,59.36 66.675,50.8 67.081,50.394 72.322,50.394 72.525,50.597 XS1.5
NetDA33_14: DA33.14 R14.2 | length 39.8
  Top Layer w0.3: v1(68.072,55.982) 68.505,55.549 DA33.14 ; R14.2 74.524,89.1 74.524,88.011 76.276,86.258 76.276,81.483 74.981,80.188 74.981,74.346 v1(74.498,73.863)
  Bottom Layer w0.3: v1(68.072,55.982) 68.072,67.437 v1(74.498,73.863)
NetDA33_17: DA33.17 XS1.4 | length 3.1
  Top Layer w0.3: XS1.4 71.525,52.553 72.315,53.343 DA33.17
NetDA33_18: DA33.18 XS1.3 | length 7.9
  Top Layer w0.3: XS1.3 70.525,52.364 71.603,53.442 71.603,55.27 72.339,56.007 73.152,56.007 73.585,55.574 DA33.18
NetDA33_19: DA33.19 XS1.2 | length 11
  Top Layer w0.3: XS1.2 69.525,52.228 70.333,53.035 70.333,55.677 71.069,56.413 73.49,56.413 73.512,56.392 74.343,56.392 74.855,55.88 DA33.19
NetDA33_20: DA33.20 XS1.1 | length 17.6
  Top Layer w0.3: XS1.1 68.525,52.269 69.063,52.807 69.063,57.175 v1(68.961,57.277) ; DA33.20 76.125,57.1 76.302,57.277 v1(76.302,58.183)
  Bottom Layer w0.3: v1(68.961,57.277) 72.605,57.277 73.512,58.183 v1(76.302,58.183)
NetDD1_1: DD1.1 DD8.1 | length 26.4
  Top Layer w0.3: DD8.1 94.872,66.195 v1(95.075,66.398) ; v1(104.191,76.632) 104.64,77.081 DD1.1
  Bottom Layer w0.3: v1(95.075,66.398) 95.075,70.945 99.009,74.879 102.438,74.879 v1(104.191,76.632)
NetDD1_2: DD1.2 DD1.10 R21.1 SB3.2 | length 62.7
  Top Layer w0.3: v1(106.68,74.016) 106.68,76.098 105.685,77.093 105.685,78.736 105.91,78.961 DD1.2 106.113,84.531 107.688,84.531 109.72,86.563 DD1.10 ; v1(129.21,69.215) 129.21,53.793 130.353,52.65 SB3.2 130.65,52.65 132.1,54.1 R21.1
  Bottom Layer w0.3: v1(106.68,74.016) 107.95,74.016 109.906,72.06 126.365,72.06 v1(129.21,69.215)
NetDD1_3: DD1.3 DD5.2 | length 50.2
  Top Layer w0.3: v1(91.338,49.815) 91.7,49.454 DD5.2 ; v1(106.636,77.917) 106.636,79.281 107.18,79.824 DD1.3
  Bottom Layer w0.3: v1(91.338,49.815) 91.23,49.924 91.23,76.295 91.973,77.038 102.391,77.038 103.27,77.917 v1(106.636,77.917)
NetDD1_6: DD1.6 DD2.14 | length 17.9
  Top Layer w0.3: DD2.14 111.481,73.195 112.077,73.791 115.853,73.791 v1(116.713,74.651) ; DD1.6 110.99,82.99 v1(116.713,77.267)
  Bottom Layer w0.3: v1(116.713,74.651) v1(116.713,77.267)
NetDD1_8: DD1.8 DD5.5 | length 51.1
  Top Layer w0.3: DD5.5 93.65,49.295 94.031,49.676 94.031,51.867 v1(93.65,52.248) ; v1(105.639,71.831) 106.743,71.831 108.565,73.654 108.565,77.804 109.017,78.256 109.017,84.946 112.26,88.189 DD1.8
  Bottom Layer w0.3: v1(93.65,52.248) 93.171,52.726 93.171,61.628 99.877,68.334 99.877,68.484 100.381,68.988 102.795,68.988 v1(105.639,71.831)
NetDD1_9: DD1.9 DD8.12 R20.1 SB2.2 | length 52.3
  Top Layer w0.3: SB2.2 104.013,53.6 ; v1(103.632,56.109) 103.632,53.981 104.013,53.6 ; v1(103.632,60.808) 103.325,61.115 DD8.12 100.886,61.115 100.635,61.366 100.635,64.008 100.94,64.313 102.413,64.313 102.87,64.77 102.87,76.479 103.302,76.911 103.302,83.922 106.477,87.097 106.477,89.444 106.883,89.85 110.751,89.85 110.99,89.611 DD1.9 ; 104.013,53.6 104.038,53.575 R20.1 104.013,53.6
  Bottom Layer w0.3: v1(103.632,56.109) v1(103.632,60.808)
NetDD1_11: DD1.11 DD2.4 DD3.11 DD5.11 DD7.11 | length 82.8
  Top Layer w0.3: v1(94.056,61.011) 94.3,60.767 DD5.11 ; v3(103.759,72.974) 105.41,74.625 105.41,76.441 105.285,76.566 105.285,84.531 105.904,85.149 106.651,85.149 108.45,86.948 DD1.11 ; DD2.4 121.394,74.465 121.996,73.863 121.996,73.152 ; v1(121.996,68.047) 121.996,73.152 ; DD3.11 125.85,74.386 125.239,73.775 DD7.11 122.619,73.775 121.996,73.152
  Bottom Layer w0.3: v1(94.056,61.011) 94.232,60.835 97.13,60.835 97.996,61.701 103.958,61.701 111.354,69.097 111.354,69.909 ; v3(103.759,72.974) 103.905,73.12 108.143,73.12 111.354,69.909 ; v1(121.996,68.047) 113.216,68.047 111.354,69.909
NetDD1_12: DD1.12 DD7.3 | length 36.4
  Top Layer w0.3: DD1.12 107.18,87.706 v1(107.383,87.503) ; v1(126.771,72.873) 127.819,71.825 DD7.3
  Bottom Layer w0.3: v1(107.383,87.503) 122.86,87.503 123.393,86.97 123.393,76.251 v1(126.771,72.873)
NetDD1_13: DD1.13 DD2.9 | length 19.7
  Top Layer w0.3: DD1.13 105.91,89.92 106.24,90.25 112.213,90.25 112.801,89.662 112.801,86.893 110.439,84.531 110.439,79.545 DD2.9
NetDD2_1: DD2.1 DD3.2 DD7.4 | length 42.5
  Top Layer w0.3: DD2.1 120.625,70.655 121.347,69.932 121.347,68.656 120.534,67.843 v1(120.534,67.005) ; DD3.2 128.45,84.531 128.704,84.785 130.454,84.785 131.013,84.226 131.013,78.08 ; DD7.4 128.626,72.475 128.473,72.627 128.473,75.54 131.013,78.08 ; v1(129.718,76.048) 129.718,76.556 131.013,77.851 131.013,78.08
  Bottom Layer w0.3: v1(120.534,67.005) 128.702,67.005 130.095,68.398 130.095,75.671 v1(129.718,76.048)
NetDD2_6: DD2.6 DD4.2 DD4.5 R22.1 SB4.2 | length 63.8
  Top Layer w0.3: v1(100.762,68.047) 101.05,68.335 DD4.2 ; v1(105.08,67.589) 104.86,67.809 DD4.5 105.179,70.005 105.283,69.901 105.283,69.494 106.571,68.207 106.571,61.517 106.858,61.804 ; v1(106.451,60.249) 106.858,60.655 106.858,61.804 ; v1(112.125,54.575) R22.1 118.925,54.072 117.603,52.75 SB4.2 ; DD2.6 120.033,77.005 118.595,75.568 112.078,75.568 111.618,75.108 110.134,75.108 109.931,74.905 109.931,73.711 106.858,70.637 106.858,61.804
  Bottom Layer w0.3: v1(100.762,68.047) 100.885,68.17 104.5,68.17 v1(105.08,67.589) ; v1(106.451,60.249) v1(112.125,54.575)
NetDD2_10: DD2.10 DD6.11 | length 26.9
  Top Layer w0.3: v1(94.158,78.74) 93.675,78.257 93.675,74.549 95.124,73.1 DD6.11 ; v1(109.474,77.368) 109.474,77.572 110.177,78.275 DD2.10
  Bottom Layer w0.3: v1(94.158,78.74) 95.25,79.832 108.509,79.832 109.474,78.867 v1(109.474,77.368)
NetDD2_12: DD2.12 DD3.9 DD4.6 DD5.9 DD7.9 | length 54.4
  Top Layer w0.3: DD5.9 95.6,58.522 96.311,59.233 103.753,59.233 106.171,61.651 106.171,64.162 104.191,66.142 104.191,70.714 104.394,70.917 106.394,70.917 ; DD4.6 106.13,70.653 106.394,70.917 ; DD7.9 123.926,75.075 124.55,75.699 DD3.9 124.55,77.775 122.199,77.775 122.098,77.673 119.782,77.673 118.262,76.153 111.636,76.153 111.218,75.735 DD2.12 109.83,75.735 109.525,75.43 109.525,74.048 106.394,70.917
NetDD2_13: DD2.13 DD6.13 | length 28.6
  Top Layer w0.3: v1(94.565,75.64) DD6.13 ; DD2.13 115.003,74.465 v1(115.214,74.676)
  Bottom Layer w0.3: v1(94.565,75.64) 101.726,75.64 103.603,77.517 104.601,77.517 106.401,75.717 114.173,75.717 v1(115.214,74.676)
NetDD3_3: DD3.3 DD4.4 | length 35.9
  Top Layer w0.3: DD4.4 103.59,71.553 105.163,73.126 107.207,73.126 108.165,74.083 108.165,76.366 v1(107.62,76.911) ; v1(121.996,85.623) 122.403,85.217 127.457,85.217 127.8,84.874 DD3.3
  Bottom Layer w0.3: v1(107.62,76.911) 108.048,76.483 112.856,76.483 v1(121.996,85.623)
NetDD3_10: DD3.10 DD4.3 DD5.10 DD6.12 DD7.10 | length 64.7
  Top Layer w0.3: DD5.10 94.95,60.431 v1(96.241,61.722) ; DD6.12 96.723,74.37 97.307,73.786 97.307,62.789 v1(97.396,62.7) ; v3(101.553,73.25) 102.32,72.483 DD4.3 102.32,67.624 v1(101.981,67.285) ; v3(121.742,75.692) 121.742,74.933 122.25,74.425 DD7.10 124.227,74.425 125.2,75.398 DD3.10
  Bottom Layer w0.3: v1(96.241,61.722) 96.418,61.722 v1(97.396,62.7) v1(101.981,67.285) ; v3(101.553,73.25) 102.163,73.859 104.601,73.859 105.643,74.901 112.136,74.901 113.671,73.366 119.416,73.366 v3(121.742,75.692)
NetDD3_14: DD3.14 DD8.14 R19.1 SB1.2 | length 72.8
  Top Layer w0.3: DD8.14 105.283,63.655 ; v1(121.895,80.137) 120.345,81.686 120.345,82.271 ; SB1.2 125.012,86.525 124.887,86.4 R19.1 123.6,86.512 121.107,86.512 120.345,85.75 120.345,82.271 ; DD3.14 127.8,79.159 127.279,79.68 122.936,79.68 120.345,82.271
  Bottom Layer w0.3: 105.283,63.655 105.286,63.652 108.024,66.391 108.024,72.636 107.94,72.72 104.851,72.72 103.628,71.497 101.024,71.497 100.588,71.933 100.588,73.588 101.259,74.259 104.19,74.259 105.232,75.301 112.622,75.301 114.158,73.766 117.246,73.766 121.895,78.414 v1(121.895,80.137)
NetDD4_1: DD4.1 DD5.3 | length 25
  Top Layer w0.3: v1(92.126,51.181) 92.257,51.05 92.257,49.092 92.35,49.092 DD5.3 ; v1(98.222,67.945) 98.393,67.945 99.78,69.332 DD4.1
  Bottom Layer w0.3: v1(92.126,51.181) 92.126,61.849 v1(98.222,67.945)
NetDD5_15: DD5.15 DD8.10 | length 14.7
  Top Layer w0.3: DD5.15 91.7,53.442 91.979,53.162 96.215,53.162 98.298,55.245 98.298,58.118 98.755,58.575 DD8.10
NetDD6_10: DD6.10 XS5.1 | length 23.3
  Top Layer w0.3: DD6.10 94.481,71.83 93.269,73.042 93.269,80.061 98.4,85.192 XS5.1
NetR2_2: R2.2 VT1.1 | length 2.8
  Top Layer w0.3: VT1.1 54.05,68.675 R2.2
NetR4_2: R4.2 R5.1 VT2.2 | length 8.3
  Top Layer w0.3: VT2.2 52.665,55.55 53.198,56.083 53.198,56.627 ; R5.1 51.7,59.613 53.198,58.115 53.198,56.627 ; R4.2 53.198,56.627
NetR8_2: R8.2 R9.2 VT1.2 | length 7.4
  Top Layer w0.3: R8.2 50.75,67.075 51.05,66.775 VT1.2 54.075,66.775 R9.2
NetR24_1: R24.1 R25.2 R26.2 | length 28.1
  Top Layer w0.3: R26.2 40.425,64.528 40.564,64.389 43.078,64.389 ; R24.1 41.325,62.636 43.078,64.389 ; R25.2 50.55,76.606 50.444,76.5 45.283,76.5 43.561,74.778 43.561,64.872 43.078,64.389
NetR24_2: R24.2 VT2.3 | length 10.1
  Top Layer w0.3: R24.2 VT2.3
pads on no net: DA1.2 DA6.5 DA6.8 DA7.5 DA7.8 DA33.2 DA33.3 DA33.4 DA33.5 DA33.23 DD2.2 DD2.3 DD2.5 DD2.7 DD2.11 DD2.15 DD3.6 DD4.8 DD4.9 DD4.10 DD4.11 DD4.12 DD4.13 DD5.6 DD6.1 DD6.2 DD6.3 DD6.4 DD6.5 DD6.6 DD6.8 DD6.9 DD7.6 DD8.2 DD8.3 DD8.4 DD8.5 DD8.6 DD8.7 DD8.9 DD8.11 DD8.13 DD8.15 R7.2 R14.1 SB1.3 SB2.3 SB3.3 SB4.3 VT2.1 VT2.4 XS1.11 XS1.12 XS2.3 XS2.4 XS3.4 XS3.5 XS4.5 XS4.6 XS5.3 XS5.4
copper on no net: | length 40.4
  Top Layer w0.254: 39.17,46.27 39.275,46.375
  Top Layer w0.3: 110.075,68.695 110.947,68.695 111.735,69.482 111.735,72.669 111.959,72.894 113.792,72.894 114.152,72.534 114.152,70.024 115.361,68.815 117.157,68.815 118.65,70.307 118.65,72.05 ; 113.57,66.533 113.57,72.05 ; 120.104,75.879 120.663,75.879 121.107,76.323
  Bottom Layer w0.3: v4(111.971,63.73) 117.164,63.73 117.643,64.209 119.148,64.209 119.32,64.38 126.942,64.38 v4(127.395,64.833)
  other v2: 42.3,49.2 139.2,49.3 42.3,93.55 139.2,93.7

## Polygon pours and split planes (outlines as drawn)
D on Bottom Layer "D_L02_P012" (solid, pour order 12): 95.3,96.4 95.359,96.341 141.781,96.341 141.781,46.316 141.723,46.375 64.025,46.375 64.025,65.2 89.6,65.2 89.6,77.692 91.9,77.692 91.9,81.5 95.3,81.5
A on Bottom Layer "A_L02_P010" (solid, pour order 10): 94.9,96.4 39.275,96.4 39.275,46.375 63.675,46.375 63.675,65.6 89.2,65.6 89.2,78.1 91.5,78.1 91.5,81.8 94.9,81.8
A on Bottom Layer "GND A" (solid, shelved, pour order 7): 39.275,46.375 39.275,96.4 142.075,96.4 142.075,46.375
"+5V D" on Top Layer "+5V_D_L01_P013" (solid, pour order 13): 95.3,96.4 95.359,96.341 141.781,96.341 141.781,46.316 141.723,46.375 64.025,46.375 64.025,65.2 89.6,65.2 89.6,77.692 91.9,77.692 91.9,81.5 95.3,81.5
A on Top Layer "A_L01_P011" (solid, pour order 11): 94.9,96.4 39.275,96.4 39.275,46.375 63.675,46.375 63.675,65.6 89.2,65.6 89.2,78.1 91.5,78.1 91.5,81.8 94.9,81.8
A on Top Layer "GND A" (solid, shelved, pour order 6): 38.981,46.316 38.981,96.341 141.781,96.341 141.781,46.316

## Other copper
Top Layer:
  pour cut-out: 68.327,65.6 68.327,67.331 74.503,73.507 74.608,73.507 74.712,73.611 74.751,73.611 74.751,73.649 74.855,73.754 74.855,73.973 74.751,74.077 74.751,74.116 74.712,74.116 74.608,74.22 74.389,74.22 74.284,74.116 74.246,74.116 74.246,74.077 74.142,73.973 74.142,73.84 67.817,67.515 67.817,65.6
  pour cut-out: 89.6,77.692 89.6,77.587 91.946,77.587 91.975,77.617 91.9,77.692 89.6,77.692
  pour cut-out: 95.3,82.62 108.797,82.62 112.222,79.196 112.393,79.196 112.393,78.884 112.471,78.807 112.278,78.614 112.004,78.614 111.785,78.833 111.785,78.939 108.614,82.11 95.3,82.11
  pour cut-out: 91.9,77.692 92.004,77.587 94.657,77.587 95.754,78.684 108.084,78.684 108.203,78.803 108.203,79.076 108.009,79.269 107.935,79.194 95.648,79.194 94.552,78.097 91.9,78.097
  pour cut-out: 67.817,65.2 68.327,65.2 68.327,55.92 68.402,55.845 68.181,55.625 67.924,55.625 67.742,55.807 67.742,56.155 67.817,56.23
  pour cut-out: 94.9,82.62 94.9,82.11 84.731,82.11 84.729,82.113 84.729,82.617 85.227,82.617 85.23,82.62
  pour cut-out: 89.2,78.097 80.836,78.097 80.005,77.267 79.861,77.267 79.68,77.086 79.68,76.938 79.653,76.911 79.68,76.884 79.68,76.736 79.835,76.582 79.983,76.582 80.01,76.554 80.037,76.582 80.185,76.582 80.34,76.736 80.34,76.88 81.047,77.587 89.2,77.587
  pour cut-out: 94.9,96.4 94.9,81.8 92.608,81.8 91.5,81.8 91.5,78.1 89.792,78.1 89.2,78.1 89.2,65.6 63.675,65.6 63.675,54.4 63.675,46.375 64.025,46.375 64.025,54.8 64.025,65.2 89.6,65.2 89.6,77.692 91.9,77.692 91.9,81.5 95.3,81.5 95.3,96.4
Bottom Layer:
  pour cut-out: 89.725,77.5 89.687,77.5 89.6,77.587 89.704,77.692 89.917,77.692 89.725,77.5 89.687,77.5 89.6,77.587
  pour cut-out: 89.6,77.587 89.704,77.692 89.917,77.692 89.725,77.5 91.975,77.5 91.975,77.617 91.9,77.692 89.6,77.692
  pour cut-out: 95.3,96.85 94.9,96.85 94.9,81.8 92.608,81.8 91.5,81.8 91.5,78.1 89.792,78.1 89.2,78.1 89.2,65.6 63.675,65.6 63.675,46.375 64.075,46.375 64.075,65.2 89.6,65.2 89.6,77.692 91.9,77.692 91.9,81.5 95.3,81.5

## Silkscreen, mask and mechanical layers (free items; w line width, h text height)
Top Overlay:
  drawing of 195 lines, arcs and shapes, not listed
Bottom Overlay:
  lines w0.254: 35.175,94.85 35.675,96.45 ; 35.191,47.822 35.675,46.275 ; 35.7,96.5 35.7,46.27 39.17,46.27 ; 35.741,46.353 36.225,47.9 ; 35.75,96.4 36.234,94.853 ; 39.15,42.825 142.225,42.825 142.225,46.295 ; 39.2,42.8 40.8,42.3 ; 39.25,42.875 40.797,43.359 ; 140.575,43.35 142.122,42.866 ; 140.653,42.316 142.2,42.8
  lines w0.3: 35.7,96.5 39.2,96.5 ; 39.15,42.825 39.15,46.325
  lines w0.5: 39.275,46.375 39.275,96.4 142.075,96.4 142.075,46.375 39.3,46.375
  text "50" at 34.85,69.275 h1.52 r90
  text "105" at 88.525,43.825 h1.52
Drill Drawing:
  lines w0.254: 35.675,96.45 35.675,46.22 39.145,46.22 ; 39.125,42.775 142.2,42.775 142.2,46.245 ; 39.175,42.75 40.775,42.25 ; 39.225,42.825 40.772,43.309 ; 140.55,43.3 142.097,42.816 ; 140.628,42.266 142.175,42.75
  lines w0.3: 35.675,96.45 39.175,96.45 ; 39.125,42.775 39.125,46.275
  lines w0.5: 39.25,46.325 39.25,96.35 142.05,96.35 142.05,46.325 39.275,46.325
  text "50" at 34.825,69.225 h1.52 r90
  text "105" at 88.5,43.775 h1.52